# Altium PCB 十二进十二出 .PcbDoc (part 2 of 3)
Units mil, origin at the board's own origin, x right, y up, seen from the top; angles counter-clockwise.
Board outline 4818.9 x 3440.94 mil, 2 copper layers (Top Layer, Bottom Layer); 184 components, 190 nets, 626 pads, 130 vias.
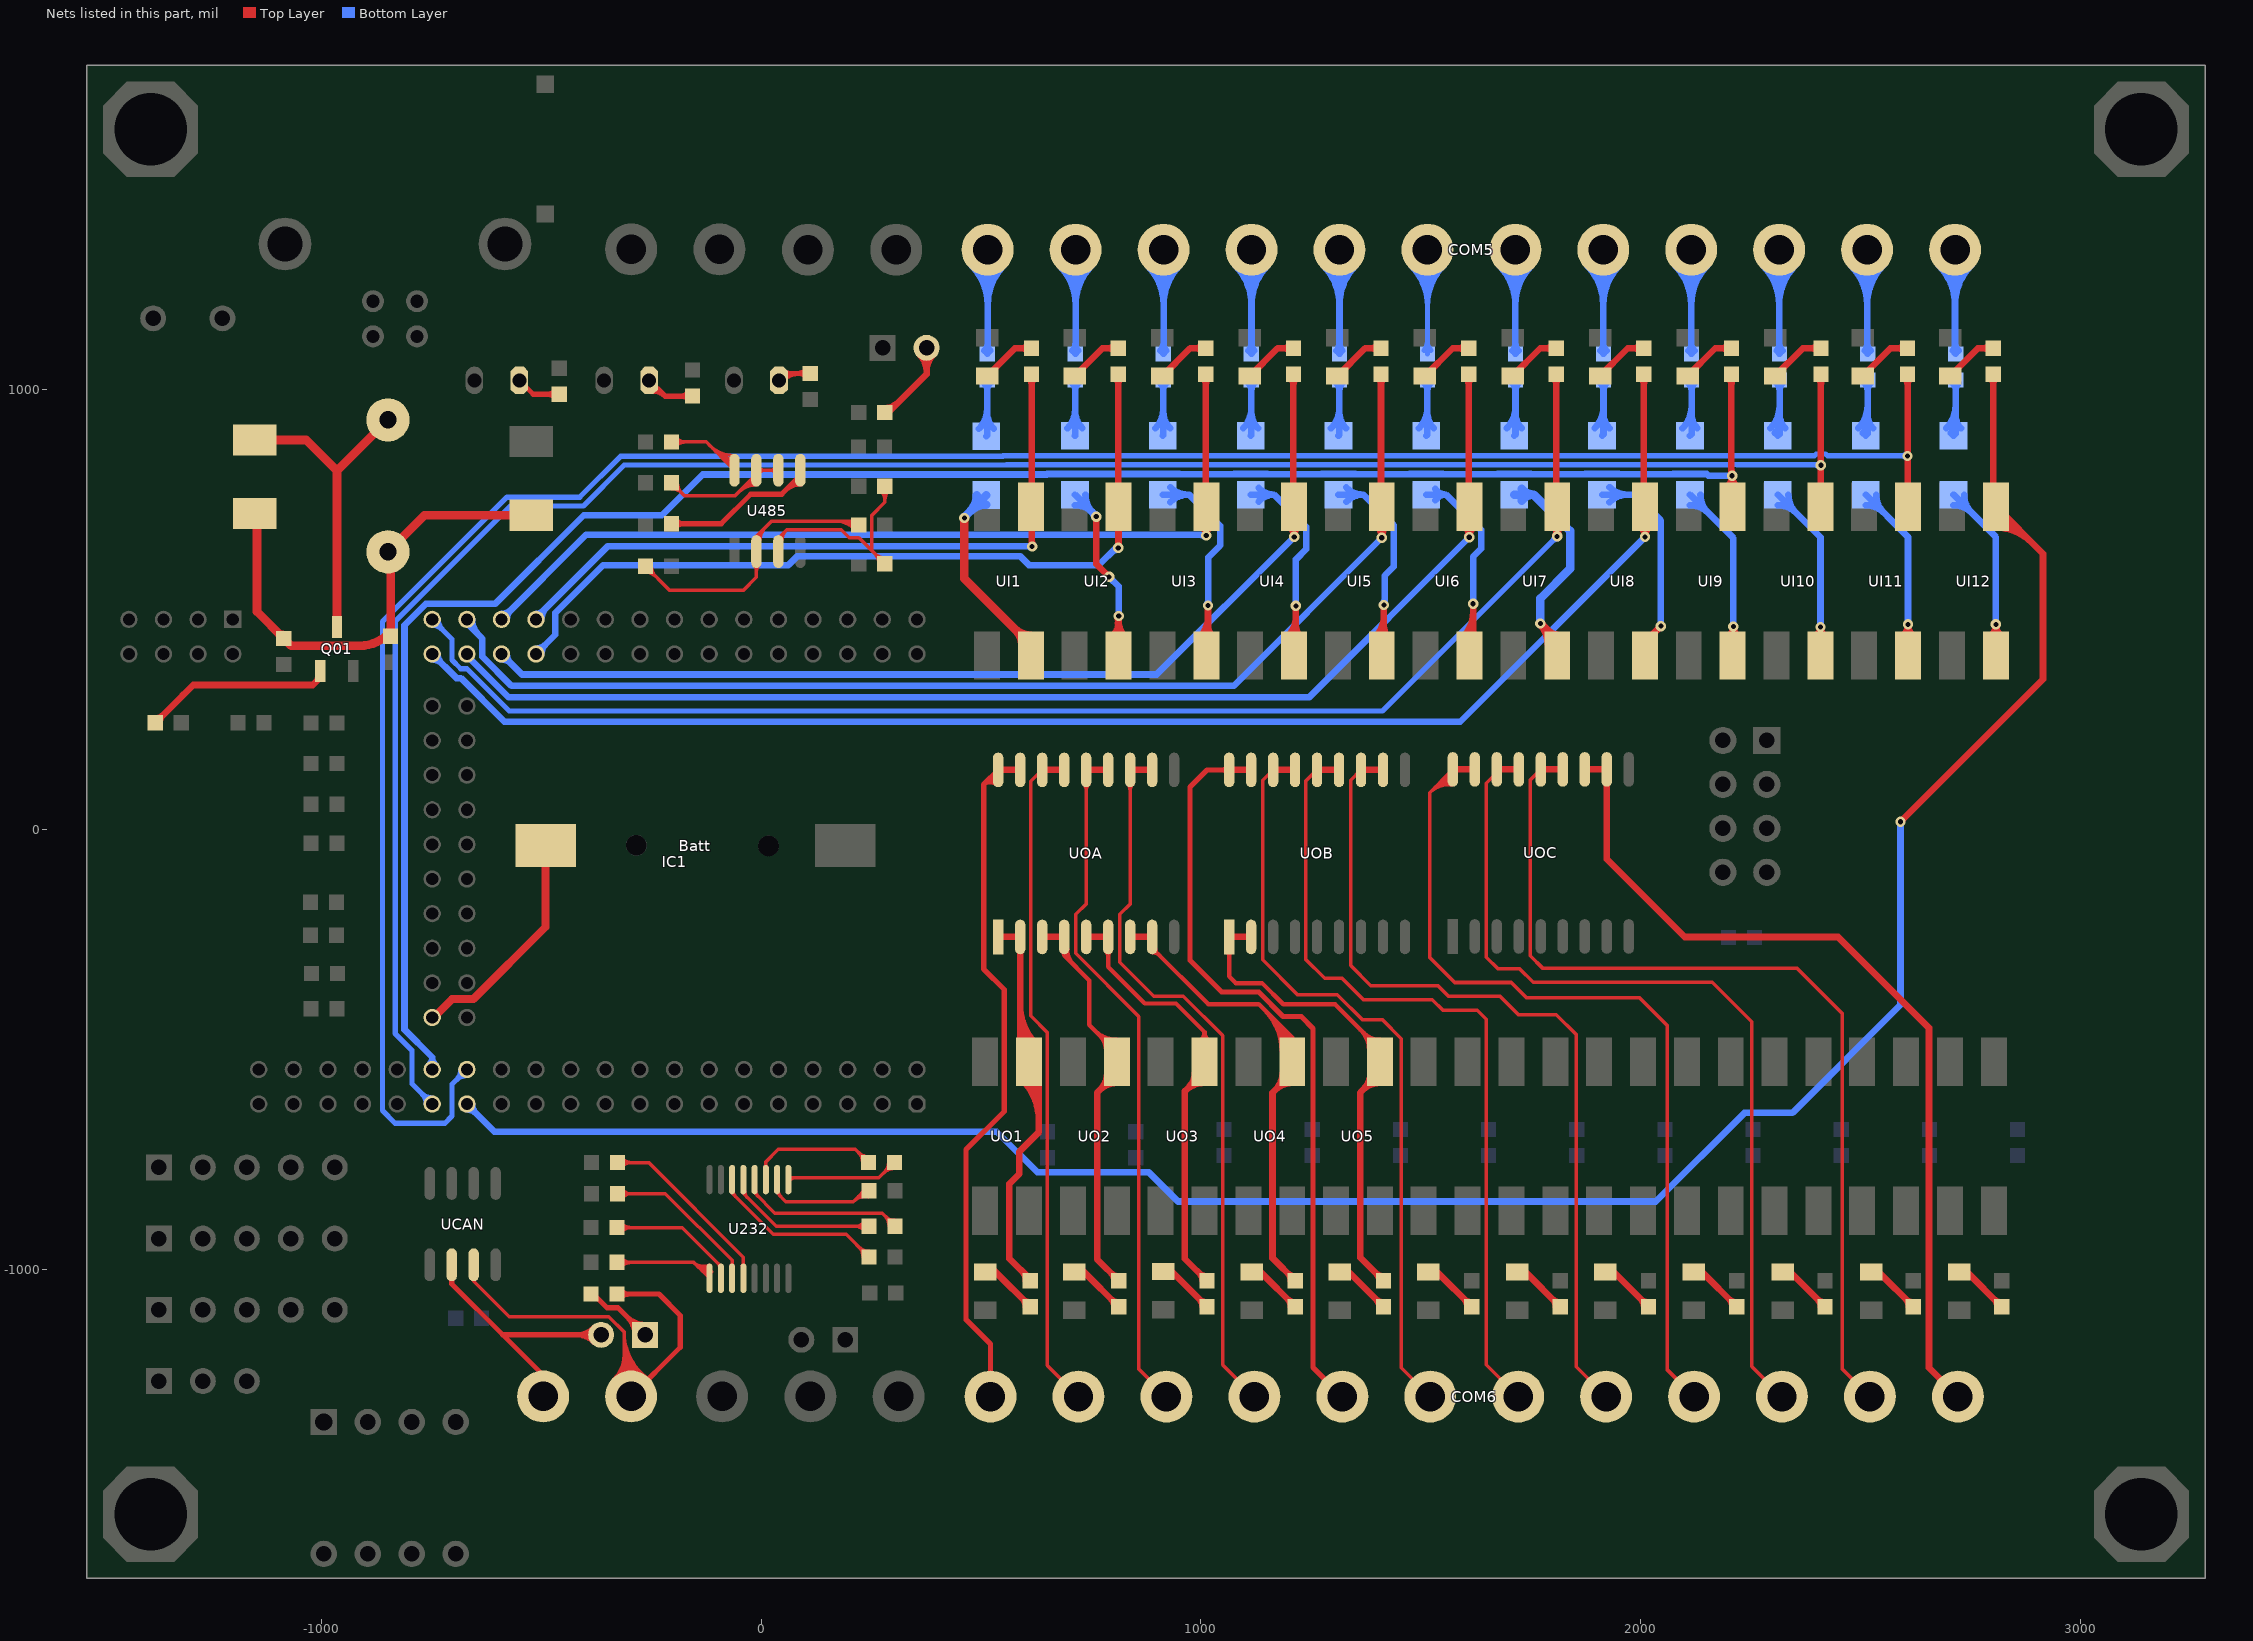
[diagram p2: the nets of this part, all layers, seen from the top]

## Via types
v1: diameter 23.62, hole 11.81, Top Layer to Bottom Layer, 130 vias

## Nets (pads, with @x,y where several pads share a name; then routed paths per layer and width w, separated by ;. In a path a pad name is that pad's centre, name@x,y a point inside that pad or via, vN(x,y) a via of type N, cw(c..) or ccw(c..) an arc to the next point about the centre after c; other vN are vias at no path point) (continued)
IN1: IC1.58 RI1.1 UI1.3 | length 1696.8
  Top Layer w15: RI1.1@608.09,1028.79 cw(c591.32,1012.02) 615.03,1012.02 cw(c638.75,1012.02) RI1.1@621.98,1028.79 ; RI1.1@615.03,1035.73 615.03,736.45 615.15,733.56 v1@615.15,643.79 ; 615.15,656.61 ccw(c628.97,656.61) v1@619.19,646.84
  Bottom Layer w15: IC1.58@-512,478.15 -512,481.34 -348.49,644.85 615.09,644.85 v1(616.15,643.79) ; IC1.58@-512,490.33 ccw(c-512,512.05) -496.64,496.7 ; IC1.58@-499.81,478.15 cw(c-462.69,478.15) -488.94,504.4 ; 603.18,644.85 cw(c603.18,630.82) v1@613.1,640.74
IN2: IC1.57 RI2.1 UI2.3 | length 1966.8
  Top Layer w15: RI2.1@805.09,1028.79 cw(c788.32,1012.02) 812.03,1012.02 cw(c835.75,1012.02) RI2.1@818.98,1028.79 ; RI2.1@812.03,1035.73 812.03,735.22 UI2.3@812.69,734.56 812.69,641.33 v1(812.15,640.79)
  Bottom Layer w15: IC1.57@-512,399.41 -468.31,443.09 -468.31,492.67 -359.38,601.6 61.83,601.6 82.2,621.97 588.78,621.97 609.15,601.6 767.83,601.6 807.02,640.79 v1(812.15,640.79) ; IC1.57@-512,411.59 ccw(c-512,441.01) -491.19,420.21 ccw(c-470.39,399.41) IC1.57@-499.81,399.41 ; 796.04,629.8 cw(c812.15,613.69) v1@812.15,636.48
IN3: IC1.56 RI3.1 UI3.3 | length 2199.7
  Top Layer w15: UI3.3@1000.43,690.38 cw(c986.77,668.88) v1@1012.24,668.88 ; RI3.1@1004.31,1028.79 cw(c987.54,1012.02) 1011.26,1012.02 cw(c1034.97,1012.02) RI3.1@1018.2,1028.79 ; RI3.1@1011.26,1035.73 1011.26,735.54 UI3.3@1012.24,734.56 v1@1012.24,668.88 ; v1(1012.15,668.79) v1@1012.24,668.88 ; UI3.3@1024.05,690.38 ccw(c1037.7,668.88) v1@1012.24,668.88
  Bottom Layer w15: IC1.56@-590.74,478.15 -397.91,670.97 1009.96,670.97 v1(1012.15,668.79) ; IC1.56@-590.74,490.33 ccw(c-590.74,519.75) -569.93,498.95 ccw(c-549.13,478.15) IC1.56@-578.55,478.15 ; 996.46,670.97 cw(c996.46,653.1) v1@1009.1,665.74
IN4: IC1.55 RI4.1 UI4.3 | length 2464.1
  Top Layer w15: UI4.3@1198.97,691.05 cw(c1181.19,666.15) v1@1211.78,666.15 ; RI4.1@1203.53,1028.79 cw(c1186.76,1012.02) 1210.48,1012.02 cw(c1234.19,1012.02) RI4.1@1217.42,1028.79 ; RI4.1@1210.48,1035.73 1210.48,735.86 UI4.3@1211.78,734.56 v1@1211.78,666.15 ; v1(1212.15,665.79) v1@1211.78,666.15 ; UI4.3@1224.59,691.05 ccw(c1242.38,666.15) v1@1211.78,666.15
  Bottom Layer w15: IC1.55@-590.74,387.22 cw(c-590.74,357.81) -569.93,378.61 cw(c-549.13,399.41) IC1.55@-578.55,399.41 ; IC1.55@-590.74,399.41 -544.11,352.79 899.15,352.79 v1(1212.15,665.79)
IN5: IC1.54 RI5.1 UI5.3 | length 2826.1
  Top Layer w15: UI5.3@1397.71,691.66 cw(c1375.64,663.61) v1(1411.33,663.61) ; RI5.1@1402.76,1028.79 cw(c1385.99,1012.02) 1409.7,1012.02 cw(c1433.42,1012.02) RI5.1@1416.65,1028.79 ; RI5.1@1409.7,1035.73 1409.7,736.18 UI5.3@1411.33,734.56 v1(1411.33,663.61) ; UI5.3@1424.95,691.66 ccw(c1447.02,663.61) v1(1411.33,663.61)
  Bottom Layer w15: IC1.54@-669.48,478.15 -669.48,469.53 -634.42,434.47 -634.42,393.51 -567.7,326.79 1074.51,326.79 v1(1411.33,663.61) ; IC1.54@-657.29,478.15 ccw(c-607.06,478.15) -642.58,442.63
IN6: IC1.53 RI6.1 UI6.3 | length 2962.9
  Top Layer w15: UI6.3@1597.85,691.2 cw(c1579.03,665.52) v1@1610.87,665.52 ; RI6.1@1601.98,1028.79 cw(c1585.21,1012.02) 1608.92,1012.02 cw(c1632.64,1012.02) RI6.1@1615.87,1028.79 ; v1@1606.41,666.94 ccw(c1594.77,673.67) 1607.76,677.15 ; v1@1607.1,667.84 ccw(c1597.98,676.95) 1610.87,676.95 ; RI6.1@1608.92,1035.73 1608.92,736.51 UI6.3@1610.87,734.56 v1@1610.87,665.51 ; v1(1610.15,664.79) v1@1610.87,665.51 ; UI6.3@1623.89,691.2 ccw(c1642.72,665.52) v1@1610.87,665.52
  Bottom Layer w15: IC1.53@-669.48,399.41 -669.48,396.22 -574.04,300.79 1246.15,300.79 v1(1610.15,664.79)
IN7: IC1.52 RI7.1 UI7.3 | length 3385
  Top Layer w15: UI7.3@1799.51,689.83 cw(c1788.81,671.06) v1@1810.42,671.06 ; RI7.1@1801.2,1028.79 cw(c1784.43,1012.02) 1808.15,1012.02 cw(c1831.86,1012.02) RI7.1@1815.09,1028.79 ; v1@1806.52,669.11 ccw(c1795.48,676.18) UI7.3@1808.14,679.57 ; RI7.1@1808.15,1035.73 1808.15,736.83 UI7.3@1810.42,734.56 v1@1810.42,671.06 ; v1(1810.15,666.79) 1810.15,670.79 v1@1810.42,671.06 ; 1812.55,679.02 ccw(c1825.39,675.59) v1@1813.88,668.94 ; UI7.3@1821.32,689.83 ccw(c1832.02,671.06) v1@1810.42,671.06
  Bottom Layer w12: IC1.52@-748.22,464.46 cw(c-748.22,431.43) -724.85,454.79 cw(c-701.49,478.15) IC1.52@-734.53,478.15 ; IC1.52@-748.22,478.15 -703.04,432.97 -703.04,385.51 -683.38,365.85 -669.33,365.85 -573.15,269.67 1413.02,269.67 v1(1810.15,666.79) ; v1@1804.33,666.79 cw(c1790.31,666.79) 1800.23,656.87 cw(c1810.15,646.95) v1@1810.15,660.98
IN8: IC1.51 RI8.1 UI8.3 | length 3509.5
  Top Layer w15: UI8.3@1997.09,691.09 cw(c1979.01,665.97) v1@2009.96,665.97 ; RI8.1@2000.42,1028.79 cw(c1983.65,1012.02) 2007.37,1012.02 cw(c2031.08,1012.02) RI8.1@2014.31,1028.79 ; RI8.1@2007.37,1035.73 2007.37,737.15 UI8.3@2009.96,734.56 v1@2009.96,665.97 ; v1(2010.15,665.79) v1@2009.96,665.97 ; UI8.3@2022.83,691.09 ccw(c2040.91,665.97) v1@2009.96,665.97
  Bottom Layer w15: IC1.51@-748.22,387.22 cw(c-748.22,357.81) -727.42,378.61 cw(c-706.61,399.41) IC1.51@-736.03,399.41 ; IC1.51@-748.22,399.41 -693.28,344.48 -683.07,344.48 -583.89,245.29 1589.65,245.29 v1(2010.15,665.79)
IN9: IC1.30 RI9.1 UI9.3 | length 4656.6
  Top Layer w15: UI9.3@2195.26,776.95 ccw(c2171.63,804.79) v1(2208.15,804.79) ; RI9.1@2199.64,1028.79 cw(c2182.88,1012.02) 2206.59,1012.02 cw(c2230.3,1012.02) RI9.1@2213.54,1028.79 ; v1@2206.59,804.79 RI9.1@2206.59,1035.73 ; 2206.59,818.95 ccw(c2222.31,818.95) v1@2211.19,807.84 ; UI9.3@2209.51,734.56 2208.15,735.92 v1(2208.15,804.79) ; UI9.3@2222.05,778.26 cw(c2240.4,804.79) v1(2208.15,804.79)
  Bottom Layer w15: IC1.30@-756.43,-536.47 ccw(c-773.43,-517.85) -748.22,-517.85 ; IC1.30@-748.22,-545.47 -748.22,-517.85 ; IC1.30@-740,-536.47 cw(c-723,-517.85) -748.22,-517.85 ; 2074.13,808.41 1950.53,808.41 1950.28,808.66 1874.55,808.66 1874.31,808.41 1750.71,808.41 1750.46,808.66 1674.74,808.66 1674.49,808.41 1550.89,808.41 1550.65,808.66 1474.92,808.66 1474.67,808.41 1351.07,808.41 1350.83,808.66 1275.1,808.66 1274.86,808.41 1151.25,808.41 1151.01,808.66 1075.28,808.66 1075.04,808.41 951.44,808.41 951.19,808.66 650.15,808.66 649.15,807.66 -132.98,807.66 -225.8,714.85 -403.62,714.85 -605.26,513.21 -762.74,513.21 -811.15,464.8 -811.15,-454.92 -748.22,-517.85 ; 2074.37,808.66 2150.1,808.66 2153.97,804.79 v1(2208.15,804.79)
IN10: IC1.29 RI10.1 UI10.3 | length 4922.1
  Top Layer w15: RI10.1@2403.2,1028.84 cw(c2386.43,1012.07) 2410.15,1012.07 cw(c2433.86,1012.07) RI10.1@2417.09,1028.84 ; UI10.3@2409.05,734.56 2410.15,735.65 RI10.1@2410.15,1035.79
  Bottom Layer w12: IC1.29@-761.9,-624.21 ccw(c-794.94,-624.21) -771.58,-600.85 ccw(c-748.22,-577.49) IC1.29@-748.22,-610.53 ; IC1.29@-748.22,-624.21 -794.3,-578.13 -794.3,-502 -832.52,-463.77 -832.52,473.65 -569.95,736.22 -404.42,736.22 -311.61,829.03 541.16,829.03 541.53,829.4 557.62,829.4 558.25,830.03 960.05,830.03 960.29,829.79 1066.18,829.79 1066.43,830.03 1159.86,830.03 1160.11,829.79 1266,829.79 1266.25,830.03 1359.68,830.03 1359.93,829.79 1465.82,829.79 1466.06,830.03 1559.5,830.03 1559.74,829.79 1665.64,829.79 1665.88,830.03 1759.32,830.03 1759.56,829.79 1865.46,829.79 1865.7,830.03 1959.14,830.03 1959.38,829.79 2065.27,829.79 2065.52,830.03 2197.07,830.03 2197.51,830.47 2218.78,830.47 2219.47,829.79 v1@2402.96,829.79 ; 2393.7,829.79 cw(c2393.7,812.34) v1@2406.04,824.68
  other v1: 2410.15,828.79
IN11: IC1.28 RI11.1 UI11.3 | length 5450.2
  Top Layer w15: RI11.1@2600.2,1028.84 cw(c2583.43,1012.07) 2607.15,1012.07 cw(c2630.86,1012.07) RI11.1@2614.09,1028.84 ; RI11.1@2607.15,1035.79 v1(2607.15,849.79) 2607.15,736.01 UI11.3@2608.6,734.56
  Bottom Layer w12: IC1.28@-683.16,-545.47 cw(c-716.2,-545.47) -692.84,-568.83 cw(c-669.48,-592.2) IC1.28@-669.48,-559.16 ; IC1.28@-669.48,-545.47 -703.04,-579.03 -703.04,-651.4 -719.35,-667.71 -832.45,-667.71 -861.41,-638.75 -861.41,472.87 -578.19,756.09 -412.65,756.09 -319.84,848.91 532.92,848.91 533.29,849.28 549.39,849.28 550.39,850.28 2189.2,850.28 2189.27,850.35 2227.02,850.35 2227.09,850.28 2395.31,850.28 2399.51,854.47 2420.78,854.47 2424.98,850.28 2606.66,850.28 v1(2607.15,849.79) ; 2591.94,850.28 cw(c2591.94,834.58) v1@2603.04,845.68 ; 2594.3,850.28 ccw(c2594.3,862.64) v1@2603.04,853.9
IN12: IC1.27 RI12.1 UI12.3 | length 5421.8
  Top Layer w15: v1(2591.15,17.79) 2915.15,341.79 2915.15,627.56 UI12.3@2808.15,734.56 2802.03,740.67 RI12.1@2802.03,1035.73 ; RI12.1@2795.09,1028.79 cw(c2778.32,1012.02) 2802.03,1012.02 cw(c2825.75,1012.02) RI12.1@2808.98,1028.79 ; UI12.3@2808.15,686.94 cw(c2808.15,571.98) 2889.43,653.27 ; UI12.3@2808.15,701.94 cw(c2808.15,623.19) 2863.83,678.88 ; UI12.3@2808.15,716.94 cw(c2808.15,674.41) 2838.22,704.48
  Bottom Layer w15: IC1.27@-669.48,-636.4 cw(c-669.48,-665.81) -648.68,-645.01 cw(c-627.87,-624.21) IC1.27@-657.29,-624.21 ; IC1.27@-669.48,-624.21 -606.54,-687.15 535.91,-687.15 627.73,-778.96 881.15,-778.96 948.03,-845.84 2034.52,-845.84 2236.15,-644.21 2345.15,-644.21 2591.15,-398.21 v1(2591.15,17.79)
NetBATT_1: Batt.1 IC1.32 | length 536.4
  Top Layer w18: IC1.32@-748.22,-427.36 -745,-427.36 -702.82,-385.18 -654.33,-385.18 -490.23,-221.08 ; -490.23,-213.21 -490.23,-221.08 ; Batt.1@-490.23,-35.93 -490.23,-221.08
NetC18_1: C18.1 C19.1 D01.K D02.K U1.1 | length 1169.7
  Top Layer w19.68: D01.K@-1146.85,715.79 -1146.85,495.79 C18.1@-1085.85,434.79 -1069.14,418.07 -913.34,418.07 ccw(c-913.34,510.27) -848.14,445.08 ccw(c-860.91,457.85) -842.85,457.85 ccw(c-824.8,457.85) C19.1@-837.56,445.08 ; C18.1@-1093.33,434.79 ccw(c-1111.39,434.79) -1098.62,447.56 ccw(c-1085.85,460.33) C18.1@-1085.85,442.27 ; C19.1@-842.85,439.79 -842.85,625.79 U1.1@-848.85,631.79 -765.67,714.97 D02.K@-522.9,714.97
NetC21_1: C21.1 U232.1 | length 323.9
  Top Layer w8: U232.1@61.71,-796.01 65.7,-792.02 267.34,-792.02 C21.1@302.65,-756.71 ; U232.1@63.76,-798.05 cw(c78.33,-812.62) 78.33,-792.02 ; 278.7,-780.66 cw(c303.15,-805.11) C21.1@303.15,-770.54 ; 281.11,-778.25 ccw(c260.07,-757.21) C21.1@289.82,-757.21
NetC21_2: C21.2 U232.3 | length 359.5
  Top Layer w8: U232.3@8.49,-767.39 ccw(c3.56,-762.46) 10.53,-762.46 ccw(c17.51,-762.46) U232.3@12.58,-767.39 ; U232.3@10.53,-796.01 10.53,-755.83 39.15,-727.21 214.09,-727.21 C21.2@244.09,-757.21 ; C21.2@230.77,-757.21 ccw(c198.6,-757.21) 221.35,-734.47 ccw(c244.09,-711.73) C21.2@244.09,-743.89
NetC22_1: C22.1 U232.5 | length 413.4
  Top Layer w8: U232.5@-40.65,-796.01 -40.65,-827.42 34.15,-902.21 C22.1@245.15,-902.21 ; U232.5@-37.76,-822.58 ccw(c-19.11,-822.58) -32.3,-835.77 ; C22.1@235.73,-911.63 ccw(c212.98,-934.38) 212.98,-902.21 ccw(c212.98,-870.05) C22.1@235.73,-892.79
NetC22_2: C22.2 U232.4 | length 443.6
  Top Layer w8: U232.4@-15.06,-796.01 -13.85,-797.21 -13.85,-827.21 31.15,-872.21 275.15,-872.21 C22.2@304.67,-901.74 ; U232.4@-12.17,-822.58 ccw(c3.08,-822.58) -7.7,-833.36 ; 280.79,-877.86 cw(c256.43,-902.21) C22.2@290.88,-902.21 ; 283.07,-880.14 ccw(c304.2,-859.01) C22.2@304.2,-888.89
NetC23_1: C23.1 U232.2 | length 339.8
  Top Layer w8: U232.2@36.12,-796.01 36.12,-826.19 56.15,-846.21 209.15,-846.21 ; U232.2@39.01,-822.58 ccw(c54.69,-822.58) 43.61,-833.67 ; 220.71,-834.65 cw(c240.93,-854.87) C23.1@244.48,-826.49 ; C23.1@243.49,-834.43 ccw(c238.36,-875.42) 209.15,-846.21 ; C23.1@246.15,-809.21 209.15,-846.21
NetC24_1: C24.1 U232.6 | length 466
  Top Layer w8: U232.6@-66.24,-796.01 -66.24,-826.83 27.06,-920.13 193.06,-920.13 239.15,-966.21 C24.1@247.15,-966.21 ; U232.6@-63.35,-822.58 ccw(c-46.13,-822.58) -58.31,-834.76 ; C24.1@231.82,-972.21 ccw(c199.66,-972.21) 222.4,-949.47 ccw(c245.15,-926.73) C24.1@245.15,-958.89
NetCOM3_1: COM3.1 TM3.2 UCAN.6 | length 721.6
  Top Layer w11.81: UCAN.6@-708.03,-1019.5 cw(c-718.11,-1029.58) -703.85,-1029.58 cw(c-689.6,-1029.58) UCAN.6@-699.68,-1019.5 ; UCAN.6@-703.85,-989.73 -703.85,-1033.15 -588,-1149 ; COM3.1@-495.85,-1289.21 -495.85,-1241.15 -588,-1149 ; TM3.2@-380.7,-1165.7 ccw(c-421.03,-1206.03) -421.03,-1149 ccw(c-421.03,-1091.97) TM3.2@-380.7,-1132.3 ; TM3.2@-364,-1149 -588,-1149
NetCOM3_2: COM3.2 R15.2 UCAN.7 | length 1675.4
  Top Layer w8: UCAN.7@-656.92,-1022.51 cw(c-658.9,-1027.15) -653.85,-1027.15 ; UCAN.7@-653.85,-989.73 -653.85,-1027.15 ; UCAN.7@-650.79,-1022.51 ccw(c-648.81,-1027.15) -653.85,-1027.15 ; COM3.2@-334.78,-1250.28 ccw(c-389.79,-1195.28) -312,-1195.28 ; COM3.2@-329.13,-1255.94 ccw(c-370.48,-1214.59) -312,-1214.59 ; -312,-1224.9 ccw(c-245.18,-1224.9) COM3.2@-286.54,-1277.39 ; -312,-1208.41 ccw(c-232.18,-1208.41) COM3.2@-281.58,-1271.1 ; -312,-1191.92 ccw(c-219.19,-1191.92) COM3.2@-276.63,-1264.82 ; -312,-1175.43 ccw(c-206.2,-1175.43) COM3.2@-271.68,-1258.54 ; -312,-1158.95 ccw(c-193.2,-1158.95) COM3.2@-266.73,-1252.25 ; COM3.2@-295.85,-1289.21 -312,-1273.07 -312,-1142.45 ; COM3.2@-261.78,-1245.97 cw(c-180.21,-1142.46) -312,-1142.46 ; -653.85,-1027.15 -573.4,-1107.6 -346.85,-1107.6 -312,-1142.45
  Top Layer w11.81: R15.2@-327.8,-1056.21 -232.79,-1056.21 -184,-1105 -184,-1177.36 COM3.2@-295.85,-1289.21 ; R15.2@-319.73,-1064.29 cw(c-300.24,-1083.78) -300.24,-1056.21 cw(c-300.24,-1028.65) R15.2@-319.73,-1048.14
NetCOM5_1: COM5.1 RI13.2 | length 608.9
  Bottom Layer w15: COM5.1@478.69,1282.33 cw(c390.68,1194.32) 515.15,1194.32 cw(c639.61,1194.32) COM5.1@551.6,1282.33 ; COM5.1@489.3,1292.94 cw(c426.89,1230.54) 515.15,1230.54 cw(c603.4,1230.54) COM5.1@540.99,1292.94 ; RI13.2@507,1088.73 ccw(c487.32,1108.41) 515.15,1108.41 ; RI13.2@513.94,1081.79 515.15,1082.99 COM5.1@515.15,1318.79 ; 515.15,1102.59 ccw(c534.75,1102.59) RI13.2@520.89,1088.73
NetCOM5_2: COM5.2 RI14.2 | length 608.8
  Bottom Layer w15: COM5.2@678.69,1282.33 cw(c590.68,1194.32) 715.15,1194.32 cw(c839.61,1194.32) COM5.2@751.6,1282.33 ; COM5.2@689.3,1292.94 cw(c626.89,1230.54) 715.15,1230.54 cw(c803.4,1230.54) COM5.2@740.99,1292.94 ; RI14.2@707.25,1088.73 ccw(c688.17,1107.81) 715.15,1107.81 ; RI14.2@714.19,1081.79 715.15,1082.74 COM5.2@715.15,1318.79 ; 715.15,1103.2 ccw(c735.6,1103.2) RI14.2@721.14,1088.73
NetCOM5_3: COM5.3 RI15.2 | length 608.7
  Bottom Layer w15: COM5.3@878.69,1282.33 cw(c790.68,1194.32) 915.15,1194.32 cw(c1039.61,1194.32) COM5.3@951.6,1282.33 ; COM5.3@889.3,1292.94 cw(c826.89,1230.54) 915.15,1230.54 cw(c1003.4,1230.54) COM5.3@940.99,1292.94 ; RI15.2@907.5,1088.73 ccw(c889.03,1107.2) 915.15,1107.2 ; RI15.2@914.44,1081.79 915.15,1082.49 COM5.3@915.15,1318.79 ; 915.15,1103.8 ccw(c936.46,1103.8) RI15.2@921.39,1088.73
NetCOM5_4: COM5.4 RI16.2 | length 608.6
  Bottom Layer w15: COM5.4@1078.69,1282.33 cw(c990.68,1194.32) 1115.15,1194.32 cw(c1239.61,1194.32) COM5.4@1151.6,1282.33 ; COM5.4@1089.3,1292.94 cw(c1026.89,1230.54) 1115.15,1230.54 cw(c1203.4,1230.54) COM5.4@1140.99,1292.94 ; RI16.2@1107.75,1088.73 ccw(c1089.88,1106.6) 1115.15,1106.6 ; RI16.2@1114.69,1081.79 1115.15,1082.24 COM5.4@1115.15,1318.79 ; 1115.15,1104.41 ccw(c1137.31,1104.41) RI16.2@1121.64,1088.73
NetCOM5_5: COM5.5 RI17.2 | length 608.5
  Bottom Layer w15: COM5.5@1278.69,1282.33 cw(c1190.68,1194.32) 1315.15,1194.32 cw(c1439.61,1194.32) COM5.5@1351.6,1282.33 ; COM5.5@1289.3,1292.94 cw(c1226.89,1230.54) 1315.15,1230.54 cw(c1403.4,1230.54) COM5.5@1340.99,1292.94 ; RI17.2@1308,1088.73 ccw(c1290.73,1106) 1315.15,1106 ; RI17.2@1314.94,1081.79 1315.15,1081.99 COM5.5@1315.15,1318.79 ; 1315.15,1105.01 ccw(c1338.16,1105.01) RI17.2@1321.89,1088.73
NetCOM5_6: COM5.6 RI18.2 | length 747
  Bottom Layer w12: COM5.6@1477.63,1281.27 cw(c1387.06,1190.7) 1515.15,1190.7 cw(c1643.23,1190.7) COM5.6@1552.66,1281.27 ; COM5.6@1486.12,1289.76 cw(c1416.03,1219.67) 1515.15,1219.67 cw(c1614.26,1219.67) COM5.6@1544.18,1289.76 ; COM5.6@1494.6,1298.24 cw(c1445,1248.64) 1515.15,1248.64 cw(c1585.29,1248.64) COM5.6@1535.69,1298.24 ; RI18.2@1507.19,1089.79 ccw(c1487.97,1109.01) 1515.15,1109.01 ; 1515.15,1109.23 ccw(c1542.64,1109.23) RI18.2@1523.2,1089.79 ; COM5.6@1515.15,1318.79 1515.15,1081.83 RI18.2@1515.19,1081.79
NetCOM5_7: COM5.7 RI19.2 | length 608.5
  Bottom Layer w15: COM5.7@1678.69,1282.33 cw(c1590.68,1194.32) 1715.15,1194.32 cw(c1839.61,1194.32) COM5.7@1751.6,1282.33 ; COM5.7@1689.3,1292.94 cw(c1626.89,1230.54) 1715.15,1230.54 cw(c1803.4,1230.54) COM5.7@1740.99,1292.94 ; RI19.2@1708.5,1088.73 ccw(c1692.44,1104.79) 1715.15,1104.79 ; 1715.15,1106.22 ccw(c1739.87,1106.22) RI19.2@1722.39,1088.73 ; COM5.7@1715.15,1318.79 1715.15,1082.08 RI19.2@1715.44,1081.79
NetCOM5_8: COM5.8 RI20.2 | length 608.6
  Bottom Layer w15: COM5.8@1878.69,1282.33 cw(c1790.68,1194.32) 1915.15,1194.32 cw(c2039.61,1194.32) COM5.8@1951.6,1282.33 ; COM5.8@1889.3,1292.94 cw(c1826.89,1230.54) 1915.15,1230.54 cw(c2003.4,1230.54) COM5.8@1940.99,1292.94 ; RI20.2@1908.75,1088.73 ccw(c1893.29,1104.18) 1915.15,1104.18 ; 1915.15,1106.82 ccw(c1940.72,1106.82) RI20.2@1922.64,1088.73 ; COM5.8@1915.15,1318.79 1915.15,1082.33 RI20.2@1915.69,1081.79
NetCOM5_9: COM5.9 RI21.2 | length 608.7
  Bottom Layer w15: COM5.9@2078.69,1282.33 cw(c1990.68,1194.32) 2115.15,1194.32 cw(c2239.61,1194.32) COM5.9@2151.6,1282.33 ; COM5.9@2089.3,1292.94 cw(c2026.89,1230.54) 2115.15,1230.54 cw(c2203.4,1230.54) COM5.9@2140.99,1292.94 ; RI21.2@2109,1088.73 ccw(c2094.15,1103.58) 2115.15,1103.58 ; 2115.15,1107.42 ccw(c2141.58,1107.42) RI21.2@2122.89,1088.73 ; COM5.9@2115.15,1318.79 2115.15,1082.58 RI21.2@2115.94,1081.79
NetCOM5_10: COM5.10 RI22.2 | length 608.8
  Bottom Layer w15: COM5.10@2278.69,1282.33 cw(c2190.68,1194.32) 2315.15,1194.32 cw(c2439.61,1194.32) COM5.10@2351.6,1282.33 ; COM5.10@2289.3,1292.94 cw(c2226.89,1230.54) 2315.15,1230.54 cw(c2403.4,1230.54) COM5.10@2340.99,1292.94 ; RI22.2@2309.25,1088.73 ccw(c2295,1102.98) 2315.15,1102.98 ; 2315.15,1108.03 ccw(c2342.43,1108.03) RI22.2@2323.14,1088.73 ; COM5.10@2315.15,1318.79 2315.15,1082.83 RI22.2@2316.19,1081.79
NetCOM5_11: COM5.11 RI23.2 | length 608.9
  Bottom Layer w15: COM5.11@2478.69,1282.33 cw(c2390.68,1194.32) 2515.15,1194.32 cw(c2639.61,1194.32) COM5.11@2551.6,1282.33 ; COM5.11@2489.3,1292.94 cw(c2426.89,1230.54) 2515.15,1230.54 cw(c2603.4,1230.54) COM5.11@2540.99,1292.94 ; RI23.2@2509.5,1088.73 ccw(c2495.86,1102.37) 2515.15,1102.37 ; 2515.15,1108.63 ccw(c2543.28,1108.63) RI23.2@2523.39,1088.73 ; COM5.11@2515.15,1318.79 2515.15,1083.08 RI23.2@2516.44,1081.79
NetCOM5_12: COM5.12 RI24.2 | length 609
  Bottom Layer w15: COM5.12@2678.69,1282.33 cw(c2590.68,1194.32) 2715.15,1194.32 cw(c2839.61,1194.32) COM5.12@2751.6,1282.33 ; COM5.12@2689.3,1292.94 cw(c2626.89,1230.54) 2715.15,1230.54 cw(c2803.4,1230.54) COM5.12@2740.99,1292.94 ; RI24.2@2709.75,1088.73 ccw(c2696.71,1101.77) 2715.15,1101.77 ; 2715.15,1109.23 ccw(c2744.14,1109.23) RI24.2@2723.64,1088.73 ; COM5.12@2715.15,1318.79 2715.15,1083.33 RI24.2@2716.69,1081.79
NetCOM6_1: COM6.1 UOA.17 UOA.18 | length 1630.1
  Top Layer w12: 515.12,111.9 cw(c529.62,97.4) UOA.18@543.05,112.91 ; COM6.1@521.57,-1289.43 521.57,-1170.15 466.02,-1114.59 466.02,-727.56 552.82,-640.76 552.82,-363.82 506,-317 506,102.79 ; UOA.18@535.2,103.84 ccw(c521.16,87.63) 506,102.79 ; UOA.18@539,135.79 506,102.79
  Top Layer w15: UOA.18@539,135.79 UOA.17@589,135.79
NetCOM6_2: COM6.2 UOA.15 UOA.16 | length 1531
  Top Layer w8: UOA.16@639,135.79 613,109.79 613,-423.63 650.82,-461.45 650.82,-1218.67 COM6.2@721.57,-1289.43
  Top Layer w15: UOA.16@639,135.79 UOA.15@689,135.79
NetCOM6_3: COM6.3 UOA.13 UOA.14 | length 1600.1
  Top Layer w8: UOA.14@733.48,102.71 cw(c720.14,89.37) 739,89.37 cw(c757.86,89.37) UOA.14@744.52,102.71 ; UOA.14@739,135.79 739,-169.2 715.31,-192.89 715.31,-281.5 859,-425.19 859,-1226.85 COM6.3@921.57,-1289.43
  Top Layer w15: UOA.14@739,135.79 UOA.13@789,135.79
NetCOM6_4: COM6.4 UOA.11 UOA.12 | length 1680.9
  Top Layer w8: UOA.12@833.48,102.71 cw(c820.14,89.37) 839,89.37 cw(c857.86,89.37) UOA.12@844.52,102.71 ; UOA.12@839,135.79 839,-169.2 815.31,-192.89 815.31,-301.32 892.66,-378.66 959.98,-378.66 1049.73,-468.4 1049.73,-1217.58 COM6.4@1121.57,-1289.43
  Top Layer w15: UOA.12@839,135.79 UOA.11@889,135.79
NetCOM6_5: COM6.5 UOB.17 UOB.18 | length 1780.2
  Top Layer w12: UOB.18@1060.04,131.68 ccw(c1050.12,121.76) 1050.12,135.79 ccw(c1050.12,149.82) UOB.18@1060.04,139.9 ; UOB.18@1064.15,135.79 1014.15,135.79 975,96.64 975,-297 1047.53,-369.53 1131.47,-369.53 1187.15,-425.21 1228.15,-425.21 1255.18,-452.25 1255.18,-1223.04 COM6.5@1321.57,-1289.43
  Top Layer w15: UOB.18@1064.15,135.79 UOB.17@1114.15,135.79
NetCOM6_6: COM6.6 UOB.15 UOB.16 | length 1722.4
  Top Layer w8: UOB.16@1164.15,135.79 1140.46,112.1 1140.46,-296 1219.67,-375.21 1310.15,-375.21 1367.9,-432.97 1413.2,-432.97 1456,-475.77 1456,-1223.85 COM6.6@1521.57,-1289.43
  Top Layer w15: UOB.16@1164.15,135.79 UOB.15@1214.15,135.79
NetCOM6_7: COM6.7 UOB.13 UOB.14 | length 1846.8
  Top Layer w8: UOB.14@1264.15,135.79 1238,109.64 1238,-294.45 1281.89,-338.34 1321,-338.34 1369.66,-387 1489.44,-387 1489.47,-386.96 1526.34,-386.96 1550.62,-411.24 1628.67,-411.24 1649.09,-431.66 1649.09,-1216.95 COM6.7@1721.57,-1289.43
  Top Layer w15: UOB.14@1264.15,135.79 UOB.13@1314.15,135.79
NetCOM6_8: COM6.8 UOB.11 UOB.12 | length 1934.4
  Top Layer w8: UOB.12@1364.15,135.79 1340.46,112.1 1340.46,-309.05 1386.41,-355 1539.27,-355 1563.77,-379.5 1681.09,-379.5 1722.29,-420.7 1808.33,-420.7 1853.55,-465.92 1853.55,-1221.4 COM6.8@1921.57,-1289.43
  Top Layer w15: UOB.12@1364.15,135.79 UOB.11@1414.15,135.79
NetCOM6_9: COM6.9 UOC.17 UOC.18 | length 2143.1
  Top Layer w8: 1531.58,95.51 cw(c1566.53,60.57) UOC.18@1573.02,109.55 ; 1543.04,106.96 cw(c1569.21,80.79) UOC.18@1574.08,117.48 ; 1554.5,118.42 cw(c1571.89,101.02) UOC.18@1575.13,125.41 ; UOC.18@1565.95,129.87 cw(c1574.58,121.25) UOC.18@1576.18,133.34 ; UOC.18@1571.97,101.62 ccw(c1563.84,40.34) 1520.13,84.05 ; UOC.18@1573,136.92 1520.13,84.05 ; COM6.9@2121.57,-1289.43 2060.15,-1228.01 2060.15,-445.23 1997.88,-382.95 1740.76,-382.95 1705.55,-347.75 1576.92,-347.75 1520.13,-290.95 1520.13,84.05
  Top Layer w15: UOC.18@1573,136.92 UOC.17@1623,136.92
NetCOM6_10: COM6.10 UOC.15 UOC.16 | length 2032.4
  Top Layer w8: UOC.16@1673,136.92 1673,129 1649.31,105.32 1649.31,-290.32 1675,-316 1724.36,-316 1755.56,-347.2 2163.26,-347.2 2253.15,-437.09 2253.15,-1221 COM6.10@2321.57,-1289.43
  Top Layer w15: UOC.16@1673,136.92 UOC.15@1723,136.92
NetCOM6_11: COM6.11 UOC.13 UOC.14 | length 2144.8
  Top Layer w8: UOC.14@1773,136.92 1749,112.92 1749,-287 1776.87,-314.87 2354.81,-314.87 2459.15,-419.21 2459.15,-1227 COM6.11@2521.57,-1289.43
  Top Layer w15: UOC.14@1773,136.92 UOC.13@1823,136.92
NetCOM6_12: COM6.12 UOC.11 UOC.12 | length 2011.5
  Top Layer w15: UOC.12@1873,136.92 UOC.11@1923,136.92 1923,-67 2100.21,-244.21 2449.15,-244.21 2655.96,-451.03 2655.96,-958.51 2656,-958.55 2656,-1223.85 COM6.12@2721.57,-1289.43
NetD01_A: D01.A Q01.3 U1.2 | length 735.3
  Top Layer w20: D01.A@-1151.9,886.29 -1035.36,886.29 -964.85,815.79 ; Q01.3@-964.85,460.79 -964.85,815.79 ; U1.2@-848.85,931.79 -964.85,815.79
NetDI1_A: DI1.A UI1.2 | length 604.8
  Top Layer w19.68: v1(462.15,708.79) 462.15,570.79 613.15,419.79 UI1.2@613.15,395.98 ; 576.5,456.43 ccw(c613.15,493.07) UI1.2@613.15,441.25 ; 580.8,452.13 cw(c550.23,421.57) UI1.2@593.46,421.57
  Bottom Layer w19.68: v1(462.15,708.79) 462.15,710.79 DI1.A@512.15,760.79 ; DI1.A@490.49,760.79 cw(c438.22,760.79) 475.18,723.82 cw(c512.15,686.86) DI1.A@512.15,739.13
NetDI1_K: DI1.K RI13.1 | length 257.1
  Bottom Layer w15: DI1.K@495.18,911.61 ccw(c449.88,956.91) 513.94,956.91 ; RI13.1@507,1015.79 cw(c490.23,999.02) 513.94,999.02 cw(c537.66,999.02) RI13.1@520.89,1015.79 ; DI1.K@512.15,894.65 513.94,896.44 RI13.1@513.94,1022.73 ; 513.94,948.24 ccw(c565.74,948.24) DI1.K@529.11,911.61
NetDI2_A: DI2.A UI2.2 | length 637.6
  Top Layer w15: v1(762.15,711.79) 762.15,603.79 v1@786.15,579.79 ; UI2.2@797.12,437.14 ccw(c758.41,475.84) v1@813.15,475.84 ; v1@809.41,483.63 cw(c792.79,474.03) 811.33,469.07 ; v1@810.15,488.79 v1(813.15,485.79) 813.15,396.43 UI2.2@812.69,395.98 ; 813.15,473.65 ccw(c864.77,473.65) UI2.2@828.27,437.14
  Bottom Layer w15: DI2.A@713.51,737.79 cw(c713.51,679.86) 754.47,720.82 cw(c795.44,761.79) DI2.A@737.51,761.79 ; DI2.A@713.51,761.79 762.15,713.15 v1(762.15,711.79) ; 746.79,725.26 cw(c734.77,704.45) v1@757.98,710.67 ; 752.53,724.18 ccw(c767.83,733.02) v1@763.26,715.95 ; 753.82,721.47 cw(c744.13,711.79) v1@757.83,711.79 ; v1(791.15,574.79) 813.15,552.79 v1(813.15,485.79)
NetDI2_K: DI2.K RI14.1 | length 255.6
  Bottom Layer w15: DI2.K@696.54,912.61 ccw(c653.93,955.22) 714.19,955.22 ; RI14.1@707.25,1015.79 cw(c690.48,999.02) 714.19,999.02 cw(c737.91,999.02) RI14.1@721.14,1015.79 ; DI2.K@713.51,895.65 714.19,896.33 RI14.1@714.19,1022.73 ; 714.19,951.93 ccw(c769.79,951.93) DI2.K@730.48,912.61
NetDI3_A: DI3.A UI3.2 | length 653.6
  Top Layer w15: UI3.2@996.66,437.14 ccw(c949.62,484.18) 1016.15,484.18 ; UI3.2@1012.24,395.98 1016.15,399.89 v1(1016.15,509.79) ; 1016.15,465.31 ccw(c1055.98,465.31) UI3.2@1027.81,437.14
  Bottom Layer w15: DI3.A@913.33,761.79 973.15,761.79 1044.15,690.79 1044.15,646.42 1017.15,619.42 1017.15,510.79 v1(1016.15,509.79) ; DI3.A@930.3,744.82 cw(c971.26,703.86) 971.26,761.79 cw(c971.26,819.72) DI3.A@930.3,778.76 ; v1@1013.1,512.84 ccw(c1003.32,522.61) 1017.15,522.61
NetDI3_K: DI3.K RI15.1 | length 255.8
  Bottom Layer w15: DI3.K@896.36,912.61 ccw(c852.71,956.27) 914.44,956.27 ; RI15.1@907.5,1015.79 cw(c890.73,999.02) 914.44,999.02 cw(c938.16,999.02) RI15.1@921.39,1015.79 ; DI3.K@913.33,895.65 914.44,896.76 RI15.1@914.44,1022.73 ; 914.44,950.89 ccw(c968.57,950.89) DI3.K@930.3,912.61
NetDI4_A: DI4.A UI4.2 | length 623.2
  Top Layer w15: UI4.2@1196.21,437.14 ccw(c1148.07,485.28) 1216.15,485.28 ; UI4.2@1211.78,395.98 1216.15,400.34 v1(1216.15,508.79) ; 1216.15,464.21 ccw(c1254.43,464.21) UI4.2@1227.36,437.14
  Bottom Layer w15: DI4.A@1113.15,761.79 1166.15,761.79 ; DI4.A@1131.18,745.96 cw(c1166.14,715.26) 1166.14,761.79 ; DI4.A@1131.18,777.62 ccw(c1166.14,808.31) 1166.14,761.79 ; v1(1216.15,508.79) 1216.15,614.25 1239.33,637.44 1239.33,688.6 1166.15,761.79
NetDI4_K: DI4.K RI16.1 | length 256
  Bottom Layer w15: DI4.K@1096.18,912.61 ccw(c1051.48,957.31) 1114.69,957.31 ; RI16.1@1107.75,1015.79 cw(c1090.98,999.02) 1114.69,999.02 cw(c1138.41,999.02) RI16.1@1121.64,1015.79 ; DI4.K@1113.15,895.65 1114.69,897.19 RI16.1@1114.69,1022.73 ; 1114.69,949.85 ccw(c1167.35,949.85) DI4.K@1130.11,912.61
NetDI5_A: DI5.A UI5.2 | length 649.9
  Top Layer w15: UI5.2@1395.75,437.14 ccw(c1346.52,486.38) 1416.15,486.38 ; UI5.2@1411.33,395.98 1416.15,400.79 v1(1416.15,510.79) ; 1416.15,463.11 ccw(c1452.87,463.11) UI5.2@1426.9,437.14
  Bottom Layer w15: DI5.A@1312.96,761.79 1369.15,761.79 ; DI5.A@1330.3,745.2 cw(c1369.14,708.02) 1369.14,761.79 ; DI5.A@1330.3,778.38 ccw(c1369.14,815.55) 1369.14,761.79 ; v1@1413.1,513.84 ccw(c1400.91,526.02) 1418.15,526.02 ; v1(1416.15,510.79) 1418.15,508.79 1418.15,577.79 1438.51,598.15 1438.51,692.42 1369.15,761.79
NetDI5_K: DI5.K RI17.1 | length 256.2
  Bottom Layer w15: DI5.K@1296,912.61 ccw(c1250.26,958.35) 1314.94,958.35 ; RI17.1@1308,1015.79 cw(c1291.23,999.02) 1314.94,999.02 cw(c1338.66,999.02) RI17.1@1321.89,1015.79 ; DI5.K@1312.96,895.65 1314.94,897.62 RI17.1@1314.94,1022.73 ; 1314.94,948.8 ccw(c1366.12,948.8) DI5.K@1329.93,912.61
NetDI6_A: DI6.A UI6.2 | length 630.9
  Top Layer w15: UI6.2@1595.3,437.14 ccw(c1537.72,494.72) 1619.15,494.72 ; UI6.2@1605.9,426.54 ccw(c1573.93,458.51) 1619.15,458.51 ; UI6.2@1610.87,395.98 1619.15,404.25 v1(1619.15,513.79) ; 1619.15,454.77 ccw(c1644.08,454.77) UI6.2@1626.45,437.14
  Bottom Layer w15: DI6.A@1512.78,761.79 1557.15,761.79 ; DI6.A@1532.87,748.65 cw(c1557.14,732.78) 1557.14,761.79 ; DI6.A@1532.87,774.92 ccw(c1557.14,790.8) 1557.14,761.79 ; v1(1619.15,513.79) 1619.15,620.54 1637.33,638.73 1637.33,681.6 1557.15,761.79
NetDI6_K: DI6.K RI18.1 | length 256.3
  Bottom Layer w15: DI6.K@1495.81,912.61 ccw(c1449.03,959.39) 1515.19,959.39 ; RI18.1@1508.25,1015.79 cw(c1491.48,999.02) 1515.19,999.02 cw(c1538.91,999.02) RI18.1@1522.14,1015.79 ; DI6.K@1512.78,895.65 1515.19,898.06 RI18.1@1515.19,1022.73 ; 1515.19,947.76 ccw(c1564.9,947.76) DI6.K@1529.75,912.61
NetDI7_A: DI7.A UI7.2 | length 623
  Top Layer w19.68: UI7.2@1790.74,422.1 ccw(c1727.21,423.84) v1(1772.15,468.79) 1810.42,430.51 UI7.2@1810.42,395.98 ; UI7.2@1792.09,448.84 ccw(c1810.42,467.17) UI7.2@1810.42,441.25
  Bottom Layer w19.68: DI7.A@1712.6,761.79 1756.9,761.79 ; DI7.A@1729.69,748.48 cw(c1756.9,727.29) 1756.9,761.79 ; DI7.A@1729.69,775.09 ccw(c1756.9,796.28) 1756.9,761.79 ; v1(1772.15,468.79) 1772.15,525.6 1839.67,593.13 1839.67,679.02 1756.9,761.79
NetDI7_K: DI7.K RI19.1 | length 256.5
  Bottom Layer w15: DI7.K@1695.63,912.61 ccw(c1647.81,960.44) 1715.44,960.44 ; RI19.1@1708.5,1015.79 cw(c1691.73,999.02) 1715.44,999.02 cw(c1739.16,999.02) RI19.1@1722.39,1015.79 ; DI7.K@1712.6,895.65 1715.44,898.49 RI19.1@1715.44,1022.73 ; 1715.44,946.72 ccw(c1763.67,946.72) DI7.K@1729.57,912.61
NetDI8_A: DI8.A UI8.2 | length 571
  Top Layer w15: UI8.2@2009.96,395.98 2009.96,426.61 v1(2046.15,462.79)
  Bottom Layer w15: DI8.A@1912.42,761.79 1987.15,761.79 2046.15,702.79 v1(2046.15,462.79) ; DI8.A@1929.39,744.82 cw(c1970.35,703.86) 1970.35,761.79 cw(c1970.35,819.72) DI8.A@1929.39,778.76
NetDI8_K: DI8.K RI20.1 | length 256.7
  Bottom Layer w15: DI8.K@1895.45,912.61 ccw(c1846.58,961.48) 1915.69,961.48 ; RI20.1@1908.75,1015.79 cw(c1891.98,999.02) 1915.69,999.02 cw(c1939.41,999.02) RI20.1@1922.64,1015.79 ; DI8.K@1912.42,895.65 1915.69,898.92 RI20.1@1915.69,1022.73 ; 1915.69,945.67 ccw(c1962.45,945.67) DI8.K@1929.39,912.61
NetDI9_A: DI9.A UI9.2 | length 550.1
  Top Layer w15: UI9.2@2198.81,440.82 ccw(c2187.16,461.79) v1(2211.15,461.79) ; UI9.2@2209.51,395.98 2211.15,397.61 v1(2211.15,461.79) ; UI9.2@2222.53,439.34 cw(c2238.98,461.79) v1(2211.15,461.79)
  Bottom Layer w15: DI9.A@2112.24,737.79 cw(c2112.24,679.86) 2153.2,720.82 cw(c2194.16,761.79) DI9.A@2136.23,761.79 ; DI9.A@2112.24,761.79 2211.15,662.88 v1(2211.15,461.79)
NetDI9_K: DI9.K RI21.1 | length 256.9
  Bottom Layer w15: DI9.K@2095.27,912.61 ccw(c2045.36,962.52) 2115.94,962.52 ; RI21.1@2109,1015.79 cw(c2092.23,999.02) 2115.94,999.02 cw(c2139.66,999.02) RI21.1@2122.89,1015.79 ; DI9.K@2112.24,895.65 2115.94,899.35 RI21.1@2115.94,1022.73 ; 2115.94,944.63 ccw(c2161.22,944.63) DI9.K@2129.2,912.61
NetDI10_A: DI10.A UI10.2 | length 546
  Top Layer w15: UI10.2@2397.66,440.42 ccw(c2385.34,460.79) v1(2409.15,460.79) ; UI10.2@2409.05,395.98 2409.15,396.07 v1(2409.15,460.79) ; UI10.2@2420.58,440.34 cw(c2433.15,460.79) v1(2409.15,460.79)
  Bottom Layer w15: DI10.A@2312.05,737.79 cw(c2312.05,679.86) 2353.02,720.82 cw(c2393.98,761.79) DI10.A@2336.05,761.79 ; DI10.A@2312.05,761.79 2409.15,664.7 v1(2409.15,460.79)
NetDI10_K: DI10.K RI22.1 | length 285.2
  Bottom Layer w15: DI10.K@2295.09,912.61 ccw(c2244.14,963.57) 2316.19,963.57 ; DI10.K@2305.69,902.01 ccw(c2280.35,927.35) 2316.19,927.35 ; RI22.1@2309.25,1015.79 cw(c2292.48,999.02) 2316.19,999.02 cw(c2339.91,999.02) RI22.1@2323.14,1015.79 ; DI10.K@2312.05,895.65 2316.19,899.78 RI22.1@2316.19,1022.73 ; 2316.19,943.59 ccw(c2360,943.59) DI10.K@2329.02,912.61
NetDI11_A: DI11.A UI11.2 | length 561.1
  Top Layer w15: UI11.2@2594.74,438.69 ccw(c2572,466.79) v1(2608.15,466.79) ; UI11.2@2608.6,395.98 2608.15,396.43 v1(2608.15,466.79) ; UI11.2@2621.9,439.13 cw(c2642.83,466.79) v1(2608.15,466.79)
  Bottom Layer w15: DI11.A@2511.87,737.79 cw(c2511.87,679.86) 2552.84,720.82 cw(c2593.8,761.79) DI11.A@2535.87,761.79 ; DI11.A@2511.87,761.79 2608.15,665.51 v1(2608.15,466.79)
NetDI11_K: DI11.K RI23.1 | length 286.5
  Bottom Layer w15: DI11.K@2494.9,912.61 ccw(c2442.91,964.61) 2516.44,964.61 ; DI11.K@2505.51,902.01 ccw(c2479.12,928.39) 2516.44,928.39 ; RI23.1@2509.5,1015.79 cw(c2492.73,999.02) 2516.44,999.02 cw(c2540.16,999.02) RI23.1@2523.39,1015.79 ; DI11.K@2511.87,895.65 2516.44,900.21 RI23.1@2516.44,1022.73 ; 2516.44,942.55 ccw(c2558.77,942.55) DI11.K@2528.84,912.61
NetDI12_A: DI12.A UI12.2 | length 560.9
  Top Layer w15: UI12.2@2794.57,438.91 ccw(c2772.75,466.79) v1(2808.15,466.79) ; UI12.2@2808.15,395.98 v1(2808.15,466.79) ; UI12.2@2821.72,438.91 cw(c2843.54,466.78) v1(2808.15,466.79)
  Bottom Layer w15: DI12.A@2711.69,737.79 cw(c2711.69,679.86) 2752.65,720.82 cw(c2793.62,761.79) DI12.A@2735.69,761.79 ; DI12.A@2711.69,761.79 2808.15,665.33 v1(2808.15,466.79)
NetDI12_K: DI12.K RI24.1 | length 287.9
  Bottom Layer w15: DI12.K@2694.72,912.61 ccw(c2641.69,965.65) 2716.69,965.65 ; DI12.K@2705.33,902.01 ccw(c2677.9,929.44) 2716.69,929.44 ; RI24.1@2709.75,1015.79 cw(c2692.98,999.02) 2716.69,999.02 cw(c2740.41,999.02) RI24.1@2723.64,1015.79 ; DI12.K@2711.69,895.65 2716.69,900.65 RI24.1@2716.69,1022.73 ; 2716.69,941.5 ccw(c2757.55,941.5) DI12.K@2728.66,912.61
NetLERR_A: LERR.A R03.2 | length 213.9
  Top Layer w12: LERR.A@-254.78,1021.72 -218.78,985.73 ; LERR.A@-254.44,1008.25 cw(c-250.73,986.59) LERR.A@-235.18,1002.13 ; LERR.A@-252.41,996.43 cw(c-245.93,958.59) -218.78,985.73 ; -185.04,985.73 ccw(c-185.04,1014.98) R03.2@-164.36,994.3 ; -182.34,985.73 cw(c-182.34,960.31) R03.2@-164.36,978.28 ; R03.2@-156.35,985.73 -218.78,985.73
NetLI1_A: LI1.A RI1.2 | length 164.2
  Top Layer w15: LI1.A@514.15,1031.79 577.15,1094.79 RI1.2@615.03,1094.79 ; RI1.2@608.09,1087.84 ccw(c591.32,1071.07) 591.32,1094.79 ccw(c591.32,1118.5) RI1.2@608.09,1101.73
NetLI2_A: LI2.A RI2.2 | length 162.1
  Top Layer w15: LI2.A@713.24,1031.79 776.24,1094.79 RI2.2@812.03,1094.79 ; RI2.2@805.09,1087.84 ccw(c788.32,1071.07) 788.32,1094.79 ccw(c788.32,1118.5) RI2.2@805.09,1101.73
NetLI3_A: LI3.A RI3.2 | length 162.3
  Top Layer w15: LI3.A@912.33,1031.79 975.33,1094.79 RI3.2@1011.26,1094.79 ; RI3.2@1004.31,1087.84 ccw(c987.54,1071.07) 987.54,1094.79 ccw(c987.54,1118.5) RI3.2@1004.31,1101.73
NetLI4_A: LI4.A RI4.2 | length 162.4
  Top Layer w15: LI4.A@1111.42,1031.79 1174.42,1094.79 RI4.2@1210.48,1094.79 ; RI4.2@1203.53,1087.84 ccw(c1186.76,1071.07) 1186.76,1094.79 ccw(c1186.76,1118.5) RI4.2@1203.53,1101.73
NetLI5_A: LI5.A RI5.2 | length 162.5
  Top Layer w15: LI5.A@1310.51,1031.79 1373.51,1094.79 RI5.2@1409.7,1094.79 ; RI5.2@1402.76,1087.84 ccw(c1385.99,1071.07) 1385.99,1094.79 ccw(c1385.99,1118.5) RI5.2@1402.76,1101.73
NetLI6_A: LI6.A RI6.2 | length 162.7
  Top Layer w15: LI6.A@1509.6,1031.79 1572.6,1094.79 RI6.2@1608.92,1094.79 ; RI6.2@1601.98,1087.84 ccw(c1585.21,1071.07) 1585.21,1094.79 ccw(c1585.21,1118.5) RI6.2@1601.98,1101.73
NetLI7_A: LI7.A RI7.2 | length 162.8
  Top Layer w15: LI7.A@1708.69,1031.79 1771.69,1094.79 RI7.2@1808.15,1094.79 ; RI7.2@1801.2,1087.84 ccw(c1784.43,1071.07) 1784.43,1094.79 ccw(c1784.43,1118.5) RI7.2@1801.2,1101.73
NetLI8_A: LI8.A RI8.2 | length 162.9
  Top Layer w15: LI8.A@1907.78,1031.79 1970.78,1094.79 RI8.2@2007.37,1094.79 ; RI8.2@2000.42,1087.84 ccw(c1983.65,1071.07) 1983.65,1094.79 ccw(c1983.65,1118.5) RI8.2@2000.42,1101.73
NetLI9_A: LI9.A RI9.2 | length 163.1
  Top Layer w15: LI9.A@2106.87,1031.79 2169.87,1094.79 RI9.2@2206.59,1094.79 ; RI9.2@2199.64,1087.84 ccw(c2182.88,1071.07) 2182.88,1094.79 ccw(c2182.88,1118.5) RI9.2@2199.64,1101.73
NetLI10_A: LI10.A RI10.2 | length 167.6
  Top Layer w15: LI10.A@2305.96,1031.79 2369.02,1094.84 RI10.2@2410.15,1094.84 ; RI10.2@2403.2,1087.9 ccw(c2386.43,1071.13) 2386.43,1094.84 ccw(c2386.43,1118.56) RI10.2@2403.2,1101.79
NetLI11_A: LI11.A RI11.2 | length 165.5
  Top Layer w15: LI11.A@2505.05,1031.79 2568.11,1094.84 RI11.2@2607.15,1094.84 ; RI11.2@2600.2,1087.9 ccw(c2583.43,1071.13) 2583.43,1094.84 ccw(c2583.43,1118.56) RI11.2@2600.2,1101.79
NetLI12_A: LI12.A RI12.2 | length 161.2
  Top Layer w15: LI12.A@2704.15,1031.79 2767.15,1094.79 RI12.2@2802.03,1094.79 ; RI12.2@2795.09,1087.84 ccw(c2778.32,1071.07) 2778.32,1094.79 ccw(c2778.32,1118.5) RI12.2@2795.09,1101.73
NetLO1_A: LO1.A RO1.2 | length 181.5
  Top Layer w15: LO1.A@509.15,-1006.21 LO1.A@533.09,-1006.21 ; LO1.A@527.09,-1000.21 LO1.A@533.09,-1006.21 ; RO1.2@602.32,-1085.27 ccw(c578.61,-1085.27) 595.38,-1068.5 ccw(c612.15,-1051.73) RO1.2@612.15,-1075.44 ; RO1.2@612.15,-1085.27 LO1.A@533.09,-1006.21
NetLO2_A: LO2.A RO2.2 | length 194.8
  Top Layer w15: LO2.A@712.15,-1006.21 LO2.A@733.91,-1006.21 ; LO2.A@712.42,-1000.21 727.91,-1000.21 LO2.A@733.91,-1006.21 ; RO2.2@803.14,-1085.27 ccw(c779.43,-1085.27) 796.2,-1068.5 ccw(c812.96,-1051.73) RO2.2@812.96,-1075.44 ; RO2.2@812.96,-1085.27 LO2.A@733.91,-1006.21
NetLO3_A: LO3.A RO3.2 | length 170
  Top Layer w15: LO3.A@914.15,-1005.21 933.73,-1005.21 RO3.2@1013.78,-1085.27 ; RO3.2@1003.96,-1085.27 ccw(c980.24,-1085.27) 997.01,-1068.5 ccw(c1013.78,-1051.73) RO3.2@1013.78,-1075.44
NetLO4_A: LO4.A RO4.2 | length 169.6
  Top Layer w15: LO4.A@1114.96,-1000.21 LO4.A@1115.15,-1000.21 ; LO4.A@1115.15,-1006.21 1135.55,-1006.21 RO4.2@1214.6,-1085.27 ; RO4.2@1204.78,-1085.27 ccw(c1181.06,-1085.27) 1197.83,-1068.5 ccw(c1214.6,-1051.73) RO4.2@1214.6,-1075.44
NetLO5_A: LO5.A RO5.2 | length 191.9
  Top Layer w15: LO5.A@1316.15,-1006.21 LO5.A@1336.36,-1006.21 ; LO5.A@1316.24,-1000.21 1330.36,-1000.21 LO5.A@1336.36,-1006.21 ; RO5.2@1405.6,-1085.27 ccw(c1381.88,-1085.27) 1398.65,-1068.5 ccw(c1415.42,-1051.73) RO5.2@1415.42,-1075.44 ; RO5.2@1415.42,-1085.27 LO5.A@1336.36,-1006.21
NetLO6_A: LO6.A RO6.2 | length 191.2
  Top Layer w15: LO6.A@1517.15,-1006.21 LO6.A@1537.18,-1006.21 ; LO6.A@1517.51,-1000.21 1531.18,-1000.21 LO6.A@1537.18,-1006.21 ; RO6.2@1606.41,-1085.27 ccw(c1582.7,-1085.27) 1599.47,-1068.5 ccw(c1616.24,-1051.73) RO6.2@1616.24,-1075.44 ; RO6.2@1616.24,-1085.27 LO6.A@1537.18,-1006.21
NetLO7_A: LO7.A RO7.2 | length 168.3
  Top Layer w15: LO7.A@1718.78,-1000.21 LO7.A@1719.15,-1000.21 ; LO7.A@1719.15,-1006.21 1738,-1006.21 RO7.2@1817.05,-1085.27 ; RO7.2@1807.23,-1085.27 ccw(c1783.52,-1085.27) 1800.29,-1068.5 ccw(c1817.05,-1051.73) RO7.2@1817.05,-1075.44
NetLO8_A: LO8.A RO8.2 | length 167.8
  Top Layer w15: LO8.A@1920.05,-1000.21 LO8.A@1920.15,-1000.21 ; LO8.A@1920.15,-1006.21 1938.82,-1006.21 RO8.2@2017.87,-1085.27 ; RO8.2@2008.05,-1085.27 ccw(c1984.34,-1085.27) 2001.1,-1068.5 ccw(c2017.87,-1051.73) RO8.2@2017.87,-1075.44
NetLO9_A: LO9.A RO9.2 | length 188.3
  Top Layer w15: LO9.A@2121.15,-1006.21 LO9.A@2139.64,-1006.21 ; LO9.A@2121.33,-1000.21 2133.64,-1000.21 LO9.A@2139.64,-1006.21 ; RO9.2@2208.87,-1085.27 ccw(c2185.15,-1085.27) 2201.92,-1068.5 ccw(c2218.69,-1051.73) RO9.2@2218.69,-1075.44 ; RO9.2@2218.69,-1085.27 LO9.A@2139.64,-1006.21
NetLO10_A: LO10.A RO10.2 | length 166.4
  Top Layer w15: LO10.A@2323.15,-1006.21 2340.45,-1006.21 RO10.2@2419.51,-1085.27 ; RO10.2@2409.69,-1085.27 ccw(c2385.97,-1085.27) 2402.74,-1068.5 ccw(c2419.51,-1051.73) RO10.2@2419.51,-1075.44
NetLO11_A: LO11.A RO11.2 | length 166.2
  Top Layer w15: LO11.A@2524.15,-1006.21 2541.27,-1006.21 RO11.2@2620.33,-1085.27 ; RO11.2@2610.5,-1085.27 ccw(c2586.79,-1085.27) 2603.56,-1068.5 ccw(c2620.33,-1051.73) RO11.2@2620.33,-1075.44
NetLO12_A: LO12.A RO12.2 | length 166
  Top Layer w15: LO12.A@2725.15,-1006.21 2742.09,-1006.21 RO12.2@2821.14,-1085.27 ; RO12.2@2811.32,-1085.27 ccw(c2787.61,-1085.27) 2804.38,-1068.5 ccw(c2821.14,-1051.73) RO12.2@2821.14,-1075.44
NetLPOWER_A: LPOWER.A R01.2 | length 146.5
  Top Layer w12: LPOWER.A@-550.05,1021.72 -518.56,990.23 R01.2@-459.5,990.23 ; R01.2@-467.51,982.22 ccw(c-486.84,962.89) -486.84,990.23 ccw(c-486.84,1017.56) R01.2@-467.51,998.23
NetLRUN_A: LRUN.A R02.2 | length 173.4
  Top Layer w12: LRUN.A@40.5,1021.72 56.25,1037.47 R02.2@111.37,1037.47 ; LRUN.A@50.4,1023.32 cw(c84.55,989.17) 84.55,1037.47 ; LRUN.A@50.4,1043.12 ccw(c64.04,1056.77) 64.04,1037.47 ; R02.2@103.36,1029.47 ccw(c84.03,1010.14) 84.03,1037.47 ccw(c84.03,1064.81) R02.2@103.36,1045.48
NetQ01_1: Q01.1 R16.2 | length 482.6
  Top Layer w15: R16.2@-1377.91,242.79 -1313.91,306.79 ; R16.2@-1377.91,252.61 ccw(c-1377.91,276.32) -1361.14,259.56 ccw(c-1344.37,242.79) R16.2@-1368.09,242.79 ; -1314.91,306.79 -1313.91,306.79 ; Q01.1@-1011.49,337.15 ccw(c-1021.95,347.6) Q01.1@-1007.17,347.6 ; Q01.1@-1002.85,360.79 -1002.85,345.79 -1019.85,328.79 -1291.91,328.79 -1313.91,306.79
NetR3_2: R3.2 U232.12 | length 484.8
  Top Layer w8: R3.2@-326.8,-757.21 -255.85,-757.21 -40.65,-972.42 U232.12@-40.65,-1020.42 ; R3.2@-317.38,-766.63 cw(c-294.64,-789.38) -294.64,-757.21 cw(c-294.64,-725.05) R3.2@-317.38,-747.79 ; U232.12@-42.69,-991.8 ccw(c-47.63,-986.87) -40.65,-986.87 ccw(c-33.67,-986.87) U232.12@-38.61,-991.8
NetR4_2: R4.2 U232.11 | length 425.4
  Top Layer w8: R4.2@-326.8,-828.21 -217.85,-828.21 -66.24,-979.83 U232.11@-66.24,-1020.42 ; R4.2@-317.38,-837.63 cw(c-294.64,-860.38) -294.64,-828.21 cw(c-294.64,-796.05) R4.2@-317.38,-818.79 ; U232.11@-68.28,-991.8 ccw(c-73.22,-986.87) -66.24,-986.87 ccw(c-59.26,-986.87) U232.11@-64.2,-991.8
NetR5_2: R5.2 U232.10 | length 357.6
  Top Layer w8: R5.2@-327.8,-905.21 -179.52,-905.21 -91.83,-992.9 U232.10@-91.83,-1020.42 ; R5.2@-318.38,-914.63 cw(c-295.64,-937.38) -295.64,-905.21 cw(c-295.64,-873.05) R5.2@-318.38,-895.79 ; -97.43,-987.3 cw(c-103.98,-993.84) U232.10@-94.72,-993.84
NetR6_2: R6.2 U232.9 | length 372.2
  Top Layer w8: R6.2@-327.8,-984.21 -153.63,-984.21 U232.9@-117.42,-1020.42 ; R6.2@-318.38,-993.63 cw(c-295.64,-1016.38) -295.64,-984.21 cw(c-295.64,-952.05) R6.2@-318.38,-974.79 ; -153.62,-984.21 ccw(c-130.88,-961.46) U232.9@-118.53,-991.17 ; -145.17,-992.67 ccw(c-125.91,-973.41) U232.9@-115.46,-998.56 ; -136.71,-1001.13 ccw(c-120.95,-985.36) U232.9@-112.39,-1005.95
NetR7_2: R7.2 U485.1 | length 444.4
  Top Layer w12: R7.2@-203.85,695.79 -90.85,695.79 -23.85,762.79 46.54,762.79 89.15,805.39 U485.1@89.15,817.31 ; R7.2@-195.85,687.78 cw(c-176.52,668.45) -176.52,695.79 cw(c-176.52,723.12) R7.2@-195.85,703.79 ; 55.88,772.13 cw(c89.15,738.86) U485.1@89.15,785.91 ; 76.36,792.61 cw(c89.15,779.83) U485.1@89.15,797.91
NetR8_2: R8.2 U485.2 U485.3 | length 487.3
  Top Layer w8: R8.2@-203.85,775.46 cw(c-203.85,743.3) -181.11,766.04 cw(c-158.37,788.79) R8.2@-190.53,788.79 ; R8.2@-203.85,788.79 -174.85,759.79 -59.29,759.79 -10.85,808.22 U485.3@-10.85,817.31 U485.2@39.15,817.31 ; -52.36,766.71 cw(c-10.85,725.2) U485.3@-10.85,783.91 ; -38.71,780.37 cw(c-10.85,752.52) U485.3@-10.85,791.91 ; -25.05,794.03 cw(c-10.85,779.83) U485.3@-10.85,799.91 ; U485.3@-11.39,807.68 cw(c-10.85,807.14) U485.3@-10.85,807.91 ; U485.3@-5.33,811.78 cw(c8,798.45) 8,817.31 cw(c8,836.16) U485.3@-5.33,822.83 ; U485.2@33.62,811.78 ccw(c20.29,798.45) 20.29,817.31 ccw(c20.29,836.16) U485.2@33.62,822.83
NetR9_2: R9.2 U485.4 | length 385.2
  Top Layer w8: R9.2@-203.85,881.79 -125.33,881.79 U485.4@-60.85,817.31 ; R9.2@-194.43,872.37 cw(c-171.69,849.62) -171.69,881.79 cw(c-171.69,913.95) R9.2@-194.43,891.21 ; -117.87,874.33 ccw(c-60.85,931.35) U485.4@-60.85,850.71 ; -104.22,860.67 ccw(c-60.85,904.03) U485.4@-60.85,842.71 ; -90.56,847.01 ccw(c-60.85,876.72) U485.4@-60.85,834.71 ; -76.9,833.36 ccw(c-60.85,849.41) U485.4@-60.85,826.71 ; U485.4@-63.25,819.7 ccw(c-60.85,822.09) U485.4@-60.85,818.71
NetR10_1: R10.1 R13.1 U485.6 | length 861.7
  Top Layer w8: R13.1@-262.91,585.46 cw(c-262.91,553.3) -240.17,576.04 cw(c-217.42,598.79) R13.1@-249.59,598.79 ; R13.1@-262.91,598.79 -208.91,544.79 -39.85,544.79 -10.85,573.79 U485.6@-10.85,632.27 -10.85,666.79 24.15,701.79 213.09,701.79 R10.1@222.09,692.79 ; U485.6@-16.38,601.15 cw(c-29.71,587.82) -10.85,587.82 cw(c8,587.82) U485.6@-5.33,601.15 ; U485.6@-11.04,657.86 cw(c10.06,657.86) -4.86,672.78 ; U485.6@-3.04,657.86 cw(c37.37,657.86) 8.79,686.44 ; 168.2,701.79 cw(c168.2,638.9) R10.1@212.67,683.37 ; 187.51,701.79 cw(c187.51,658.21) R10.1@218.33,689.02 ; R10.1@206.83,701.79 cw(c206.83,677.52) R10.1@223.98,694.68
NetR11_1: R11.1 R12.1 U485.7 | length 688.5
  Top Layer w8: U485.7@39.15,632.27 39.15,662.91 58.02,681.79 181.65,681.79 199.85,663.59 222.34,663.59 R11.1@281.15,604.79 251.95,633.98 251.95,715.03 281.15,744.23 R12.1@281.15,780.79 ; U485.7@46.96,657.86 cw(c78.02,657.86) 56.05,679.82 ; R12.1@271.73,771.37 cw(c248.98,748.62) 281.15,748.62 cw(c313.31,748.62) R12.1@290.57,771.37 ; 258.4,627.53 ccw(c281.15,650.27) 281.15,618.11 cw(c281.15,650.27) 258.4,627.53 ; 258.4,627.53 cw(c235.66,604.79) 267.82,604.79 ccw(c235.66,604.79) 258.4,627.53
NetR15_1: R15.1 TM3.1 | length 250.9
  Top Layer w11.81: R15.1@-386.85,-1056.21 -381.93,-1056.21 -350.83,-1087.32 -325.68,-1087.32 TM3.1@-264,-1149 ; TM3.1@-287.62,-1149 ccw(c-344.65,-1149) -304.33,-1108.67 ccw(c-264,-1068.35) TM3.1@-264,-1125.38
NetR485_1: R485.1 TM2.2 | length 308.4
  Top Layer w15: R485.1@281.15,948.79 289.15,948.79 376.15,1035.79 TM2.2@376.15,1095.79 ; R485.1@281.15,958.61 ccw(c281.15,1001.64) 311.57,971.21 ; TM2.2@360.57,1080.21 cw(c322.97,1042.61) 376.15,1042.61 cw(c429.32,1042.61) TM2.2@391.72,1080.21
NetRO1_1: RO1.1 UO1.3 UOA.1 UOA.2 | length 1355.8
  Top Layer w15: UOA.1@539,-244.13 UOA.2@589,-244.13 589,-508.02 UO1.3@609.42,-528.44 631.45,-550.47 631.45,-687.91 587.15,-732.21 587.15,-782.91 564.52,-805.54 564.52,-975.84 612.15,-1023.47 RO1.1@612.15,-1026.21 ; 589,-472.8 ccw(c639.47,-472.8) UO1.3@603.78,-508.49 ; 589,-436.59 ccw(c675.68,-436.59) UO1.3@614.39,-497.88 ; 589,-400.38 ccw(c711.89,-400.38) UO1.3@624.99,-487.27 ; 593.44,-1004.76 cw(c571.99,-1026.21) RO1.1@602.32,-1026.21 ; UO1.3@593.84,-569.61 cw(c503.06,-660.39) 631.45,-660.39 ; RO1.1@600.06,-1011.38 ccw(c612.15,-999.3) RO1.1@612.15,-1016.39 ; UO1.3@604.45,-559 cw(c539.27,-624.18) 631.45,-624.18 ; UO1.3@615.06,-548.39 cw(c575.49,-587.96) 631.45,-587.96
NetRO2_1: RO2.1 UO2.3 UOA.3 UOA.4 | length 1251.5
  Top Layer w10: UOA.4@684.71,-276.98 cw(c677.38,-286) 689,-286 ; UOA.4@685.81,-271.69 ccw(c712.65,-271.69) 693.67,-290.67 ; UOA.4@689,-244.13 689,-286 ; UOA.4@693.29,-276.98 ccw(c700.62,-286) 689,-286 ; UOA.4@695.81,-271.69 ccw(c746.79,-271.69) 710.74,-307.74 ; 760.02,-458.09 ccw(c808.87,-409.23) UO2.3@808.87,-478.32 ; 769.89,-467.96 cw(c735,-502.85) UO2.3@784.35,-502.85 ; 777.09,-475.16 ccw(c808.87,-443.38) UO2.3@808.87,-488.32 ; UO2.3@808.87,-553.49 UO2.3@808.87,-528.44 808.87,-506.94 746.15,-444.21 746.15,-343.15 689,-286
  Top Layer w15: UOA.3@639,-244.13 UOA.4@689,-244.13 ; 770.34,-592.02 cw(c808.87,-630.56) UO2.3@808.87,-576.06 ; 771.66,-590.7 ccw(c734.99,-554.03) UO2.3@786.85,-554.03 ; RO2.1@803.14,-1026.21 ccw(c779.43,-1026.21) 796.2,-1009.44 ccw(c812.96,-992.68) RO2.1@812.96,-1016.39 ; UO2.3@808.87,-553.49 763.97,-598.39 763.97,-977.22 RO2.1@812.96,-1026.21
NetRO3_1: RO3.1 UO3.3 UOA.5 UOA.6 | length 1201.8
  Top Layer w10: UOA.6@784.18,-276.51 cw(c772.56,-288.14) 789,-288.14 cw(c805.44,-288.14) UOA.6@793.82,-276.51 ; UOA.6@789,-244.13 789,-312 872.53,-395.53 943.47,-395.53 1008.33,-460.39 ; UO3.3@996.08,-481.6 ccw(c983.85,-460.4) 1008.33,-460.4 ; UO3.3@1008.33,-550.03 UO3.3@1008.33,-528.44 1008.33,-460.39 ; UO3.3@1020.58,-481.6 cw(c1032.8,-460.4) 1008.33,-460.4
  Top Layer w15: UOA.5@739,-244.13 UOA.6@789,-244.13 ; 963.89,-594.46 cw(c1008.33,-638.9) UO3.3@1008.33,-576.06 ; 973.55,-584.8 ccw(c942.78,-554.03) UO3.3@986.3,-554.03 ; RO3.1@1003.96,-1026.21 ccw(c980.24,-1026.21) 997.01,-1009.44 ccw(c1013.78,-992.68) RO3.1@1013.78,-1016.39 ; UO3.3@1008.33,-550.03 963.43,-594.93 963.43,-975.86 RO3.1@1013.78,-1026.21
NetRO4_1: RO4.1 UO4.3 UOA.7 UOA.8 | length 1534.6
  Top Layer w10: UOA.8@889,-278.5 cw(c889,-301.45) 905.22,-285.22 ; UOA.8@889,-244.13 889,-269 1017.07,-397.07 1132,-397.07 1207.78,-472.85 ; UOA.8@895.81,-271.69 ccw(c905.75,-271.69) 898.72,-278.72 ; 1144.7,-409.76 cw(c1051.61,-502.85) UO4.3@1183.25,-502.85 ; 1161.77,-426.84 cw(c1085.75,-502.85) UO4.3@1193.25,-502.85 ; 1178.84,-443.91 cw(c1119.89,-502.85) UO4.3@1203.25,-502.85 ; 1195.91,-460.98 cw(c1154.04,-502.85) UO4.3@1213.25,-502.85 ; UO4.3@1202.91,-478.81 ccw(c1201.7,-472.85) 1207.78,-472.85 ; UO4.3@1207.78,-553.58 UO4.3@1207.78,-528.44 1207.78,-472.85 ; UO4.3@1212.66,-478.81 cw(c1213.87,-472.85) 1207.78,-472.85
  Top Layer w15: UOA.7@839,-244.13 UOA.8@889,-244.13 ; 1169.4,-591.96 cw(c1207.78,-630.34) UO4.3@1207.78,-576.06 ; 1170.5,-590.86 ccw(c1133.68,-554.03) UO4.3@1185.75,-554.03 ; RO4.1@1204.78,-1026.21 ccw(c1181.06,-1026.21) 1197.83,-1009.44 ccw(c1214.6,-992.68) RO4.1@1214.6,-1016.39 ; UO4.3@1207.78,-553.58 1162.88,-598.48 1162.88,-974.49 RO4.1@1214.6,-1026.21
NetRO5_1: RO5.1 UO5.3 UOB.1 UOB.2 | length 1392.7
  Top Layer w10: UOB.1@1059.33,-276.51 cw(c1047.7,-288.14) 1064.15,-288.14 cw(c1080.59,-288.14) UOB.1@1068.96,-276.51 ; UOB.1@1064.15,-244.13 1064.15,-333.81 1079.37,-349.03 1138.97,-349.03 1187.15,-397.21 1305.15,-397.21 1407.24,-499.3 UO5.3@1407.24,-528.44 ; 1362.86,-454.92 cw(c1314.93,-502.85) UO5.3@1382.71,-502.85 ; 1371.42,-463.49 ccw(c1407.24,-427.67) UO5.3@1407.24,-478.32 ; 1379.93,-472 cw(c1349.07,-502.85) UO5.3@1392.71,-502.85
  Top Layer w15: UOB.1@1064.15,-244.13 UOB.2@1114.15,-244.13 ; 1368.08,-592.28 cw(c1407.24,-631.44) UO5.3@1407.24,-576.06 ; 1370.28,-590.08 ccw(c1334.23,-554.03) UO5.3@1385.21,-554.03 ; RO5.1@1405.6,-1026.21 ccw(c1381.88,-1026.21) 1398.65,-1009.44 ccw(c1415.42,-992.68) RO5.1@1415.42,-1016.39 ; UO5.3@1407.24,-528.44 1407.24,-553.12 1362.34,-598.02 1362.34,-973.13 RO5.1@1415.42,-1026.21